# Altium PCB PCB2.PcbDoc (part 1 of 2)
Units mil, origin at the board's own origin, x right, y up, seen from the top; angles counter-clockwise.
Board outline 2500 x 2460 mil, 2 copper layers (Top Layer, Bottom Layer); 50 components, 75 nets, 347 pads, 13 vias.
Unrouted connection lines stored in the file: 43.
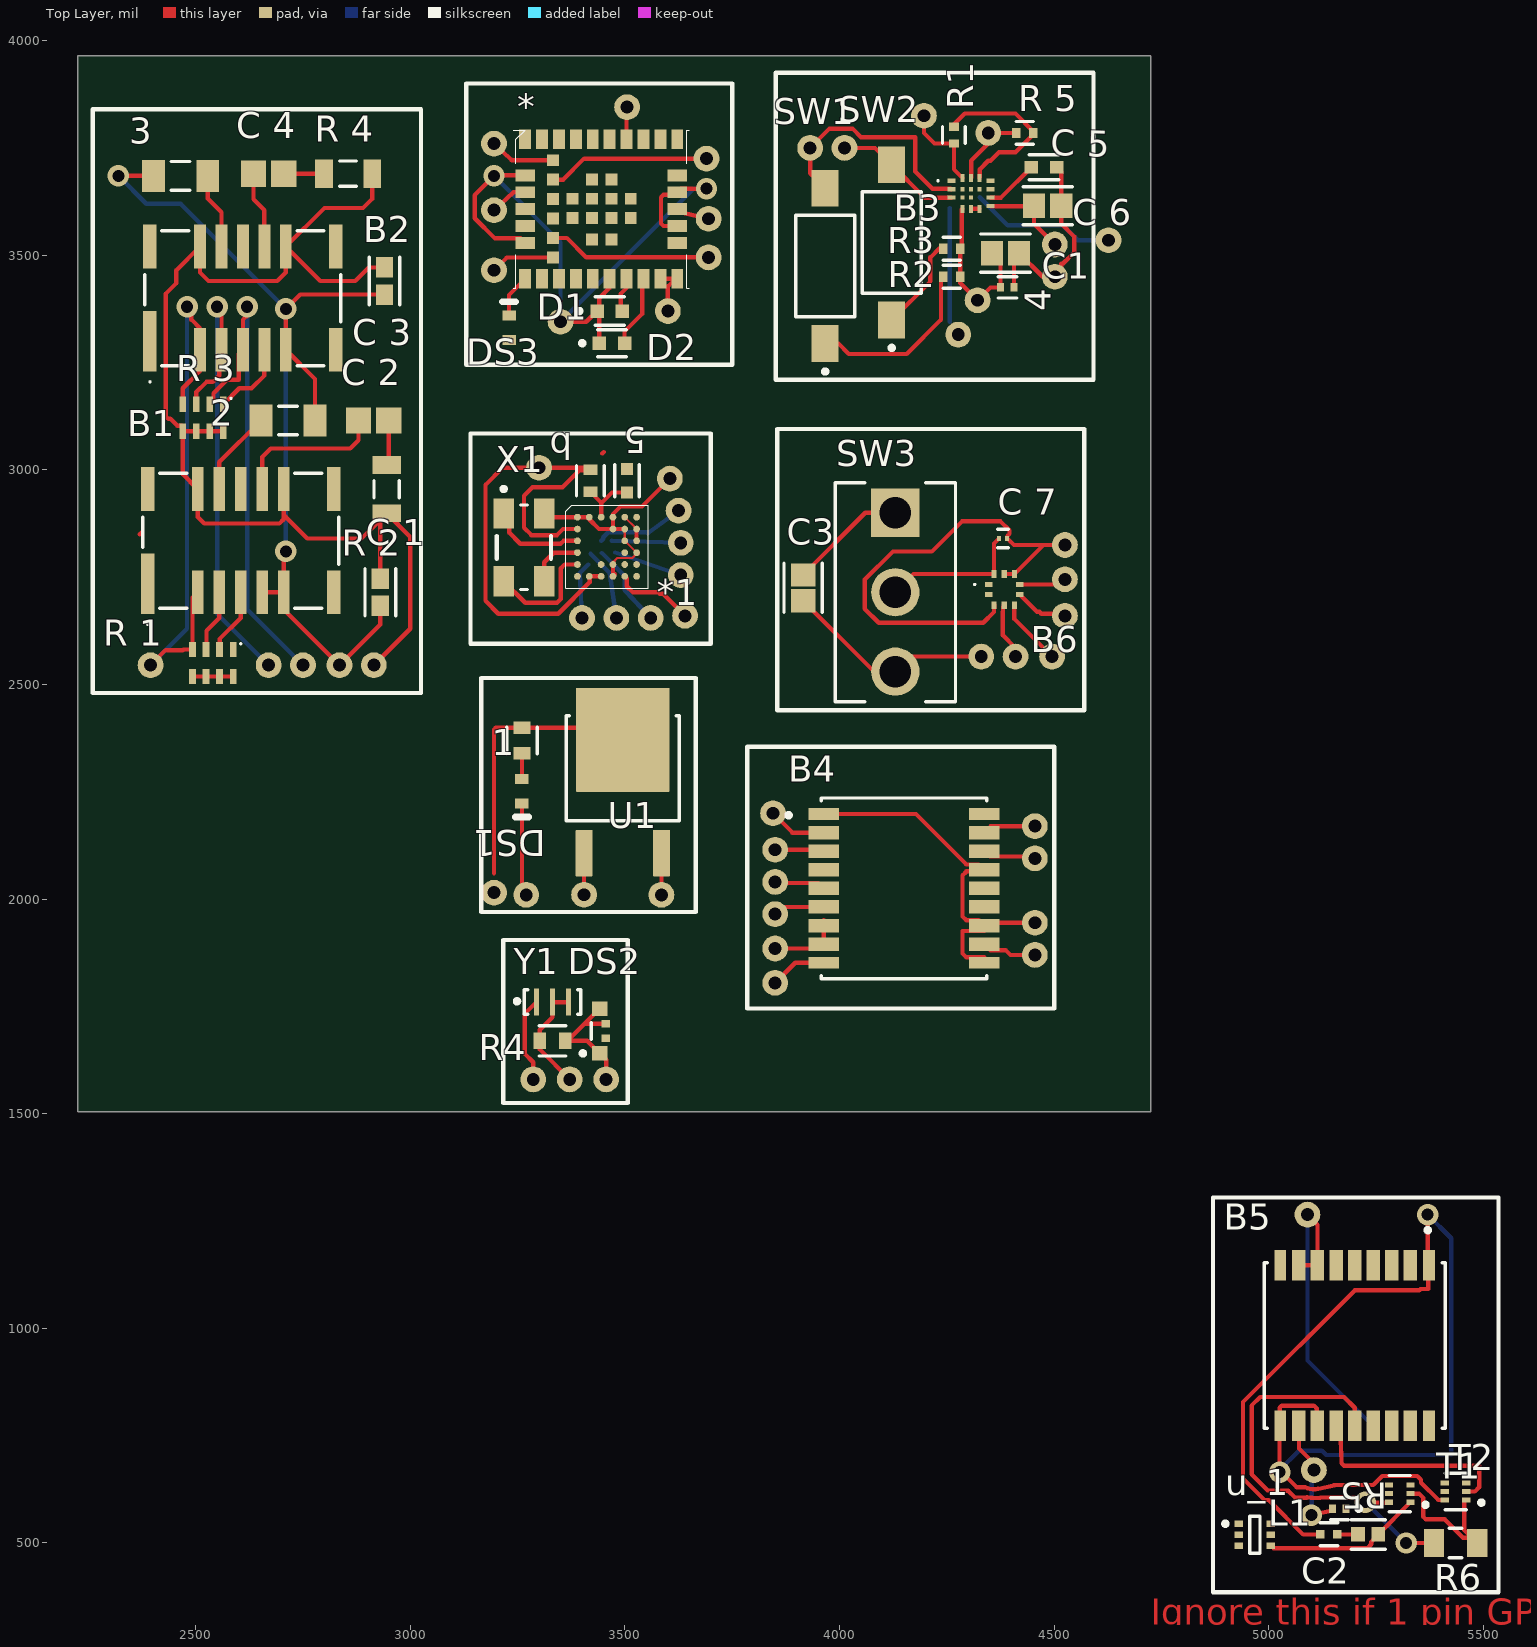
[diagram p0: Top Layer view]
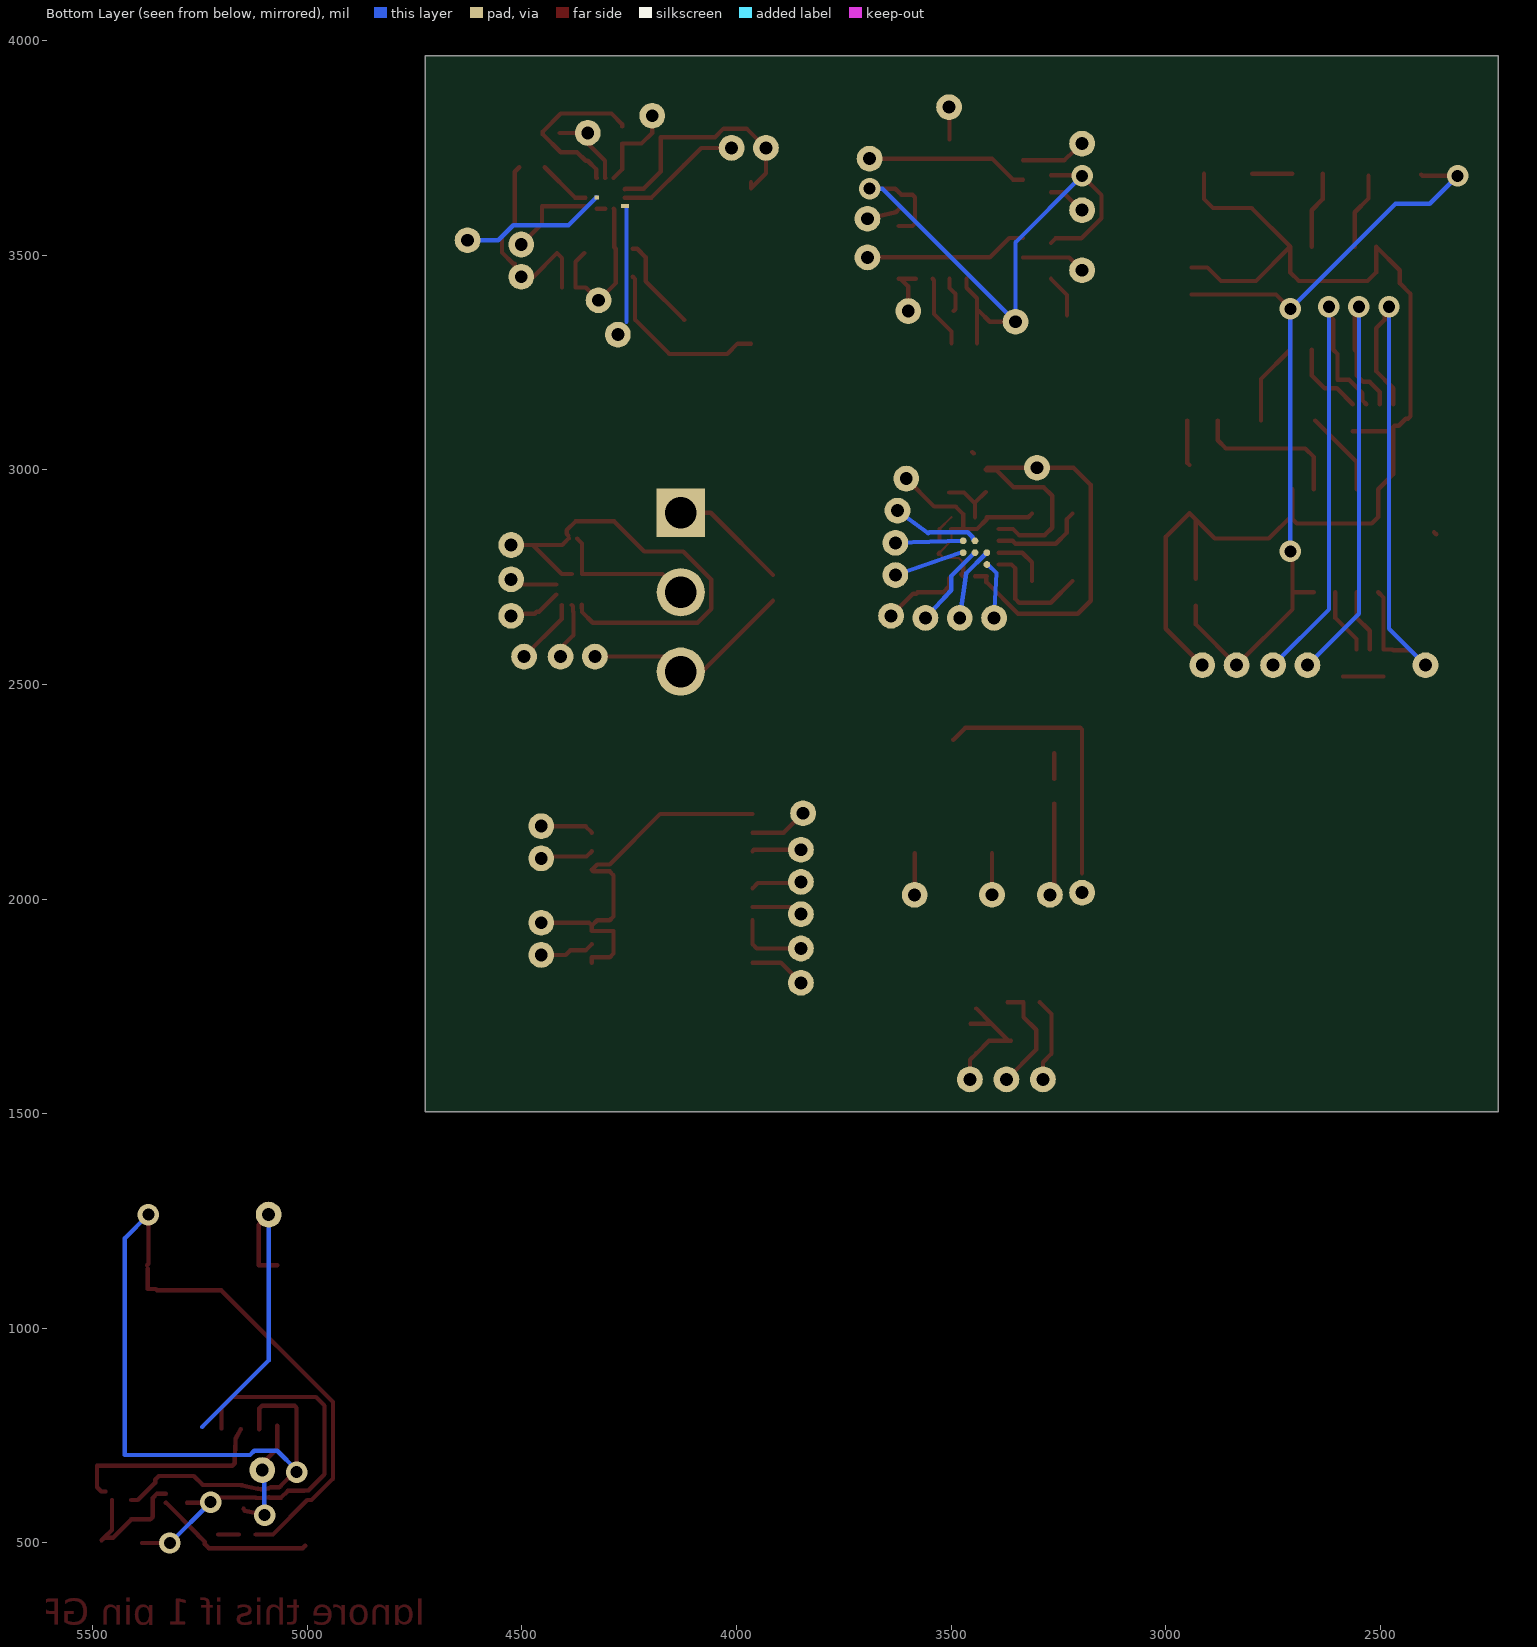
[diagram p1: Bottom Layer view, seen from below]

## Layer stack, top to bottom
Top Solder: solder mask 0.4, Solder Resist, Dk 3.5
Top Layer: signal copper 1.4
Dielectric 1: dielectric 12.6, FR-4, Dk 4.8
Bottom Layer: signal copper 1.4
Bottom Solder: solder mask 0.4, Solder Resist, Dk 3.5

## Board outline
2225,3965 2225,1505 4725,1505 4725,3965

## Design rules (kind name [scope] priority, off if disabled: settings)
Clearance [All] p1: gap=10 ignorepadtopadclearanceinfootprint=FALSE
PolygonConnect [All] p1: connectstyle=Relief reliefconductorwidth=10 reliefentries=4 polygonreliefangle="90 Angle" airgapwidth=10
RoutingVias [All] p1: holewidth=28 width=50 viastyle="Through Hole" minholewidth=28 minwidth=50 maxholewidth=28 maxwidth=50
SolderMaskExpansion [All] p1: expansion=4 istentingtop=FALSE
SupplyNets "Schematic Supply Nets_10" [InNet('1.25V')] p1: voltage=0.000
SupplyNets "Schematic Supply Nets_9" [InNet('GND')] p2: voltage=0.000
SupplyNets "Schematic Supply Nets_8" [InNet('VDD')] p3: voltage=0.000
SupplyNets "Schematic Supply Nets_7" [InNet('3.3V')] p4: voltage=0.000
SupplyNets "Schematic Supply Nets_6" [InNet('VCC')] p5: voltage=0.000
SupplyNets "Schematic Supply Nets_5" [InNet('+5')] p6: voltage=0.000
SupplyNets "Schematic Supply Nets_4" [InNet('VDDIO 1.8V')] p7: voltage=0.000
SupplyNets "Schematic Supply Nets_3" [InNet('VCC 3.3V')] p8: voltage=0.000
SupplyNets "Schematic Supply Nets_2" [InNet('antenna')] p9: voltage=0.000
SupplyNets "Schematic Supply Nets_1" [InNet('AVDD 1.8V')] p10: voltage=0.000
SupplyNets "Schematic Supply Nets" [InNet('+1.25')] p11: voltage=0.000
Width [All] p1: maxlimit=10 minlimit=10 preferedwidth=10
30 further rules are at their usual default settings.

## Components (designator, comment, footprint, x,y, rotation, side; value= is the part's Value field where it differs from the comment)
1 "CRCW0603220RFKEA" FP-CRCW0603-e3-MFG 3260,2369.53 r90 top
2 "CAP 1.5uF 16V 1206(3216)" CAPC1206(3216)190_M 2715,3115 r0 top value=1.5uF
3 "CAP 1.5uF 16V 1206(3216)" CAPC1206(3216)190_M 2465,3685 r180 top value=1.5uF
4 "GRM155R61A105KE15D" FP-GRM15-0_1-MFG 4390.75,3425 r180 top value=1uF
5 "CGA3E2C0G1H060D080AA" FP-CGA3E-0_3-0_1-MFG 3504.63,2974.63 r270 top
* "Component_1" NINA-W131 3267.52,3686.14 r0 top
*1 "Component_1" "ATA8350 - duplicate" 3389.39,2889.74 r0 top
B1 "AMG8854" AMG8854 2605,2834.92 r0 top
B2 "AMG8854" AMG8854 2610,3399.92 r0 top
B3 "BHI360" BHI360 4306.18,3644.09 r0 top
B4 "MAX-M8Q-0" FP-MAX-M8Q-0-MFG 4150,2025 r0 top
B5 "MAX-M8Q-0" FP-MAX-M8Q-0-MFG 5200,960 r270 top
B6 "LPS25HBTR" LPS25HBTR 4383.62,2721.22 r0 top
C1 "08051C104K4T2A" FP-0805-L_2_01_0_2-W_1_25-IPC_B 4386.5,3505 r180 top
C2 "CC0402KPX7R7BB103" FP-CC0402-MFG 5140,520 r180 top value="10 nF"
C3 "C2012X5R1H475K125AB" FP-C2012-125-0_2-IPC_B 3915,2725 r90 top
"C 1" "GRM188R60J106ME47D" FP-GRM188-0_1-e0_2_0_55-IPC_A 2930,2715 r270 top
"C 2" "C0805C105K8RACTU" CAPC2013X100X50ML20T25 2914.57,3115 r0 top
"C 3" "GRM188R60J106ME47D" FP-GRM188-0_1-e0_2_0_55-IPC_A 2940,3440 r270 top
"C 4" "C0805C105K8RACTU" CAPC2013X100X50ML20T25 2670,3690 r0 top
"C 5" "KAF15BR71E224KT" FP-KAF15B-MFG 4476.5,3705 r180 top
"C 6" "08051C104K4T2A" FP-0805-L_2_01_0_2-W_1_25-IPC_B 4484.77,3615 r180 top
"C 7" "GRM033R60J104KE19D" FP-GRM033-0_03-MFG 4380.65,2840 r180 top
D1 "LTST-C190GKT" FP-LTST-C190GKT-MFG 3464.53,3370 r0 top
D2 "LTST-C191TBKT" FP-LTST-C191TBKT-MFG 3469.53,3295 r0 top
DS1 "TLMS1000-GS08" VISH-TLMS1000_V 3260,2251.46 r270 top
DS2 "HSMF-C113" AVAG-HSMF-C11X_H1_V 3441.3,1692.83 r90 top
DS3 "TLMS1000-GS08" VISH-TLMS1000_V 3230,3331.46 r90 top
L1 "LQG15HN27NJ02D" FP-LQG15HH_02-MFG 5164.25,580 r180 top
q "LQW18AN12NG00D" FP-LQW18AN_00-MFG 3419.63,2974.63 r270 top (schematic designator "high Q inductor1")
R1 "AC0402FR-074K7L" FP-AC0402-MFG 4266.5,3780 r90 top
R2 "AC0402FR-074K7L" FP-AC0402-MFG 4261.5,3450 r0 top
R3 "AC0402FR-074K7L" FP-AC0402-MFG 4261.5,3515 r0 top
R4 "CRCW0603220RFKEA" FP-CRCW0603-e3-MFG 3331.3,1670 r0 top
R5 "RMCF0603JT100K" FP-RMCF0603-IPC_C 5231.34,520 r180 top
R6 "RMCF1206JT10R0" FP-RMCF1206-IPC_C 5435.22,500 r0 top
"R 1" "CAT16-103J4LF" BOUR-CAT16-103J4LF_L 2540,2550 r270 top
"R 2" "RC1206JR-0720RL" RESC3116X65X40NL10T20 2945,2955 r270 top
"R 3" "CAT16-103J4LF" BOUR-CAT16-103J4LF_L 2517.24,3121.5 r270 top
"R 4" "RC1206JR-0720RL" RESC3116X65X40NL10T20 2855,3690 r0 top
"R 5" "AC0402FR-074K7L" FP-AC0402-MFG 4431.5,3785 r0 top
SW1 "FSMSMTR" TECO-FSMSMTR_V 3966.5,3475 r90 top
SW2 "FSMSMTR" TECO-FSMSMTR_V 4121.5,3530 r90 top
SW3 "A101SYCB04" FP-A101SYCB04-MFG 4130,2715 r0 top
T1 "SI1016X-T1-GE3" FP-C14-0439-MFG 5305,615 r180 top
T2 "SI1016X-T1-GE3" FP-C14-0439-MFG 5435,620 r180 top
U1 "LM317MKVURG3" FP-KVU0003A-MFG 3495,2305 r0 top
u_1 "NC7WZ07P6X" FP-419AD-01-MFG 4967.6,519.41 r0 top
X1 "48MHz Crystal" ABRA-ABM3B-4_V 3264.63,2819.63 r270 top
Y1 "CSTCE20M0V53-R0" FP-CSTCE_V-MFG 3331.3,1760 r0 top

## Footprints (in the part's own frame and the unit in brackets; to place one, negate y for a bottom-side part, rotate by r counter-clockwise, add the part's x,y. Pads: shape width x height; smd on the part's side, far side on the other; paste and mask are expansions set on the pad)
ABRA-ABM3B-4_V [mm] "SMD, 4-Leads, Body 5x3.2mm"
  rect 1.8x1.2 smd: 1(-2,-1.2) 2(2,-1.2) 3(2,1.2) 4(-2,1.2)
  silkscreen extent -3.57,-1.6 2.5,1.6, body extent -2.5,-1.59 2.5,1.59, height 1.13
AMG8854 [mm]
  rect 0.8x3.6 smd: 1(-5.5,-2.55)
  rect 0.7x2.6 smd: 2(-2.54,-3.05) 3(-1.27,-3.05) 4(0,-3.05) 5(1.27,-3.05) 6(2.54,-3.05) 9(2.54,3.05) 10(1.27,3.05) 11(0,3.05) 12(-1.27,3.05) 13(-2.54,3.05)
  rect 0.8x2.6 smd: 7(5.5,-3.05) 8(5.5,3.05) 14(-5.5,3.05)
  silkscreen extent -5.8,-5 5.8,4
"ATA8350 - duplicate" [mm]
  round 0.4 smd: A1(0,0) A2(0.7,0) A3(1.4,0) A4(2.1,0) A5(2.8,0) A6(3.5,0) B1(0,-0.7) B4(2.1,-0.7) B5(2.8,-0.7) B6(3.5,-0.7) C1(0,-1.4) C5(2.8,-1.4) C6(3.5,-1.4) D1(0,-2.1) D5(2.8,-2.1) D6(3.5,-2.1) E1(0,-2.8) E3(1.4,-2.8) E4(2.1,-2.8) E5(2.8,-2.8) E6(3.5,-2.8) F1(0,-3.5) F2(0.7,-3.5) F3(1.4,-3.5) F4(2.1,-3.5) F5(2.8,-3.5) F6(3.5,-3.5)
  round 0.4 smd far side: C3(1.4,-1.4) C4(2.1,-1.4) D2(0.7,-2.1) D3(1.4,-2.1) D4(2.1,-2.1) E2(0.7,-2.8)
  silkscreen extent -0.7,-4.2 4.2,0.7
AVAG-HSMF-C11X_H1_V [mm] "SMD, 4-Leads, Body 2.5x1mm"
  rect 0.85x0.9 smd: 1(-1.325,0) 4(1.325,0)
  rect 0.45x0.5 smd: 2(-0.425,-0.35) 3(0.425,-0.35)
  silkscreen extent -1.45,0.5 0.5,1.12, body extent -1.25,-0.5 1.25,0.5, height 1
BHI360 [mm]
  rect 0.475x0.25 smd: 1(-1.163,0.75) 2(-1.163,0.25) 3(-1.163,-0.25) 8(1.163,-0.75) 9(1.163,-0.25) 10(1.163,0.25) 11(1.163,0.75)
  rect 0.475x0.25 smd far side: 4(-1.163,-0.75)
  rect 0.25x0.475 smd: 5(-0.5,-0.913) 6(0,-0.913) 7(0.5,-0.913) 12(0.5,0.912) 13(0,0.912) 14(-0.5,0.912)
  rect 0.25x0.25 smd: 15(-0.5,-0.25) 16(0,-0.25) 18(0.5,0.25) 19(0,0.25) 20(-0.5,0.25)
  rect 0.25x0.25 smd far side: 17(0.5,-0.25)
  silkscreen extent -2,0.7 -1.9,0.8
BOUR-CAT16-103J4LF_L [mm] "Chip Array, 8-Leads, Body 3.4x1.6mm, Pitch 0.8mm, IPC High Density"
  rect 0.9x0.4 smd: 1(-0.8,1.2) 2(-0.8,0.4) 3(-0.8,-0.4) 4(-0.8,-1.2) 5(0.8,-1.2) 6(0.8,-0.4) 7(0.8,0.4) 8(0.8,1.2)
  silkscreen extent -1.19,1.6 -1.09,1.7, body extent -0.95,-1.7 0.95,1.7, height 0.6
CAPC1206(3216)190_M [mm] "Chip Capacitor, Body 3.2x1.6mm, Height 1.9mm, IPC Low Density"
  rect 1.35x1.9 smd: 1(-1.6,0) 2(1.6,0)
  silkscreen extent -0.55,-0.85 0.55,0.85, body extent -1.7,-0.9 1.7,0.9, height 1.9
CAPC2013X100X50ML20T25 [mm] "Chip Capacitor, 2-Leads, Body 2.00x1.25mm, IPC Low Density"
  rect 1.5x1.55 smd: 1(-0.9,0) 2(0.9,0)
  body extent -1.1,-0.72 1.1,0.72, height 1
FP-419AD-01-MFG [mm]
  rect 0.5x0.4 smd paste+0 mask+0: 1(-0.95,0.65) 2(-0.95,0) 3(-0.95,-0.65) 4(0.95,-0.65) 5(0.95,0) 6(0.95,0.65)
  silkscreen extent -1.87,-1.1 0.3,1.1, body extent -1.3,-1.2 1.3,1.2, height 0.25
FP-0805-L_2_01_0_2-W_1_25-IPC_B [mil]
  rect 51.36x57.33 smd paste+0 mask+0: 1(-31.72,0) 2(31.72,0)
  silkscreen extent -57,-44 57,44, body extent -67,-39 67,39, height 10
FP-A101SYCB04-MFG [mil]
  rect 112.37x112.37 hole 73 paste-99999 mask+0: 1(0,185)
  round 112.37 hole 73 paste-99999 mask+0: 2(0,0) 3(0,-185)
  silkscreen extent -140,-255 140,255, body extent -144,-259 144,259, height 10
FP-AC0402-MFG [mm]
  rect 0.5x0.6 smd paste+0 mask+0: 1(-0.5,0) 2(0.5,0)
  silkscreen extent -0.5,-0.67 0.5,0.67, body extent -0.85,-0.4 0.85,0.4, height 0.25
FP-C14-0439-MFG [mil]
  rect 19x12 smd paste+0 mask+0: 1(-25,20) 2(-25,0) 3(-25,-20) 4(25,-20) 5(25,0) 6(25,20)
  silkscreen extent -65,-42 25,42, body extent -38,-40 38,40, height 10
FP-C2012-125-0_2-IPC_B [mil]
  rect 54.25x57.33 smd paste+0 mask+0: 1(-30.08,0) 2(30.08,0)
  silkscreen extent -57,-44 57,44, body extent -67,-39 67,39, height 10
FP-CC0402-MFG [mm]
  rect 0.5x0.5 smd paste+0 mask+0: 1(-0.5,0) 2(0.5,0)
  silkscreen extent -0.53,-0.68 0.53,0.67, body extent -0.87,-0.48 0.87,0.48, height 0.25
FP-CGA3E-0_3-0_1-MFG [mm]
  rect 0.7x0.7 smd paste+0 mask+0: 1(-0.7,0) 2(0.7,0)
  silkscreen extent -0.95,-0.72 0.95,0.72, body extent -1.15,-0.65 1.15,0.65, height 0.25
FP-CRCW0603-e3-MFG [mm]
  rect 0.75x1 smd paste+0 mask+0: 1(-0.75,0) 2(0.75,0)
  silkscreen extent -0.8,-0.9 0.8,0.9, body extent -1.22,-0.6 1.22,0.6, height 0.25
FP-CSTCE_V-MFG [mm]
  rect 0.3x1.6 smd paste+0 mask+0: 1(-0.95,0) 2(0,0) 3(0.95,0)
  silkscreen extent -2.22,-0.72 1.68,0.72, body extent -1.78,-0.9 1.78,0.9, height 0.25
FP-GRM15-0_1-MFG [mm]
  rect 0.4x0.5 smd paste+0 mask+0: 1(-0.4,0) 2(0.4,0)
  silkscreen extent -0.55,-0.63 0.55,0.63, body extent -0.7,-0.38 0.7,0.38, height 0.25
FP-GRM033-0_03-MFG [mm]
  rect 0.25x0.3 smd paste+0 mask+0: 1(-0.238,0) 2(0.238,0)
  silkscreen extent -0.32,-0.54 0.32,0.54, body extent -0.46,-0.27 0.46,0.27, height 0.25
FP-GRM188-0_1-e0_2_0_55-IPC_A [mil]
  rect 47.57x39.85 smd paste+0 mask+0: 1(-31.57,0) 2(31.57,0)
  silkscreen extent -55,-36 55,36, body extent -75,-40 75,40, height 10
FP-KAF15B-MFG [mm]
  rect 0.8x0.75 smd paste+0 mask+0: 1(-0.75,0) 2(0.75,0)
  silkscreen extent -0.87,-0.75 0.87,0.75, body extent -1.25,-0.58 1.25,0.58, height 0.25
FP-KVU0003A-MFG [mm]
  rrect10% 1x2.75 smd paste+0 mask+0: 1(-2.29,-5.025) 3(2.29,-5.025)
  rrect2% 5.55x6.15 smd paste-1000 mask+0: 4(0,1.675)
  silkscreen extent -3.35,-3.11 3.35,3.11, body extent -3.45,-6.5 3.45,4.85, height 0.25
FP-LQG15HH_02-MFG [mm]
  rect 0.4x0.5 smd paste+0 mask+0: 1(-0.4,0) 2(0.4,0)
  silkscreen extent -1.28,-0.64 0.53,0.65, body extent -0.7,-0.38 0.7,0.38, height 0.25
FP-LQW18AN_00-MFG [mm]
  rect 0.625x0.85 smd paste+0 mask+0: 1(-0.663,0) 2(0.663,0)
  silkscreen extent -0.9,-0.82 0.9,0.82, body extent -1.07,-0.6 1.07,0.6, height 0.25
FP-LTST-C190GKT-MFG [mm]
  rect 0.8x0.8 smd paste+0 mask+0: 1(-0.75,0) 2(0.75,0)
  silkscreen extent -1.92,-0.85 0.85,0.85, body extent -1.25,-0.55 1.25,0.55, height 0.25
FP-LTST-C191TBKT-MFG [mm]
  rect 0.8x0.8 smd paste+0 mask+0: 1(-0.75,0) 2(0.75,0)
  silkscreen extent -1.87,-0.8 0.85,0.8, body extent -1.25,-0.55 1.25,0.55, height 0.25
FP-MAX-M8Q-0-MFG [mm]
  rect 1.8x0.7 smd paste-1000 mask-1000: 1(-4.75,4.4) 9(-4.75,-4.4) 10(4.75,-4.4) 18(4.75,4.4)
  rect 1.8x0.8 smd paste-1000 mask-1000: 2(-4.75,3.3) 3(-4.75,2.2) 4(-4.75,1.1) 5(-4.75,0) 6(-4.75,-1.1) 7(-4.75,-2.2) 8(-4.75,-3.3) 11(4.75,-3.3) 12(4.75,-2.2) 13(4.75,-1.1) 14(4.75,0) 15(4.75,1.1) 16(4.75,2.2) 17(4.75,3.3)
  silkscreen extent -6.95,-5.35 4.9,5.35, body extent -6.35,-5.45 6.35,5.45, height 0.25
FP-RMCF0603-IPC_C [mil]
  rect 31.73x33.79 smd paste+0 mask+0: 1(-23.66,0) 2(23.66,0)
  silkscreen extent -40,-34 40,34, body extent -43,-23 43,23, height 10
FP-RMCF1206-IPC_C [mil]
  rect 47.39x65.28 smd paste+0 mask+0: 1(-50.22,0) 2(50.22,0)
  silkscreen extent -15,-34 15,34, body extent -78,-38 78,38, height 10
LPS25HBTR [mm]
  rect 0.45x0.3 smd: 1(-0.92,0.3) 2(-0.92,-0.3) 6(0.92,-0.3) 7(0.92,0.3)
  rect 0.3x0.45 smd: 3(-0.6,-0.92) 4(0,-0.92) 5(0.6,-0.92) 8(0.6,0.92) 9(0,0.92) 10(-0.6,0.92)
  silkscreen extent -1.8,0.25 -1.7,0.35
NINA-W131 [mm]
  rect 0.7x1.15 smd: 1(0,-6.125) 2(1,-6.125) 3(2,-6.125) 4(3,-6.125) 5(4,-6.125) 6(5,-6.125) 7(6,-6.125) 8(7,-6.125) 9(8,-6.125) 10(9,-6.125) 16(9,2.125) 17(8,2.125) 18(7,2.125) 19(6,2.125) 20(5,2.125) 21(4,2.125) 22(3,2.125) 23(2,2.125) 24(1,2.125) 25(0,2.125)
  rect 1.15x0.7 smd: 11(9,-4) 12(9,-3) 13(9,-2) 14(9,-1) 15(9,0) 26(0,0) 27(0,-1) 28(0,-2) 29(0,-3) 30(0,-4)
  rect 0.701x0.701 smd: 31(1.651,-4.856) 32(1.651,-3.706) 33(1.651,-2.555) 34(1.651,-1.405) 35(1.651,-0.254) 36(1.651,0.897) ""(2.802,-2.532) ""(2.802,-1.389) ""(3.952,-3.802) ""(3.952,-2.532) ""(3.952,-1.389) ""(3.952,-0.246) ""(5.103,-3.802) ""(5.103,-2.532) ""(5.103,-1.389) ""(5.103,-0.246) ""(6.253,-2.532) ""(6.253,-1.389)
  silkscreen extent -0.7,-6.68 9.7,2.67
RESC3116X65X40NL10T20 [mm] "Chip Resistor, 2-Leads, Body 3.10x1.60mm, IPC Medium Density"
  rect 1.05x1.7 smd: 1(-1.425,0) 2(1.425,0)
  silkscreen extent -0.5,-0.75 0.5,0.75, body extent -1.6,-0.85 1.6,0.85, height 0.65
TECO-FSMSMTR_V [mm] "SMD, 2-Leads, Body 6x3.5mm, Pitch 9.19mm"
  rect 2.2x1.6 smd: 1(-4.595,0)
  rect 2.18x1.6 smd: 2(4.595,0)
  silkscreen extent -6.37,-1.75 3,1.75, body extent -4.98,-1.75 4.98,1.75, height 4.4
VISH-TLMS1000_V [mm] "SMD, 2-Leads, Body 0.8x1.6mm"
  rect 0.6x0.8 smd: 1(-0.725,0) 2(0.725,0)
  silkscreen extent 1.52,-0.4 1.52,0.4, body extent -0.8,-0.4 0.8,0.4, height 0.65

## Part data
1 R4: library part CMP-2000-03085-2, "RES Thick Film, 220Ω, 1%, 0.1W, 100ppm/°C, 0603", Case Code (Imperial)=0603, Case Code (Metric)=1608, Max Operating Temperature=155°C, Max Power Dissipation=100mW, Min Operating Temperature=-55°C, Package Quantity=10, Resistance=220R, Temperature Coefficient=100ppm/°C, Tolerance=1%, Voltage Rating=75V, Case/Package=0603, Composition="Thick Film", Contact Plating=Tin, Depth=0.85mm, Features="Automotive AEC-Q200", Height=0.45mm, Lead Free="Lead Free", Length=1.55mm, Military Standard=Not, Number of Terminations=2, Packaging="Tape and Reel", Power Rating=100mW, Radiation Hardening=No, Termination=SMD/SMT, Voltage Rating (DC)=75V, Weight=7.1E-05oz, Width=0.033inch
2 3: library part CMP-1037-04758-1, "CAP 1.5uF 16V ±10% 1206 (3216 Metric) Thickness 1.9mm SMD", Case-EIA=1206, Case-Metric=3216, Rated Voltage="16 V", Tolerance=Â±10%, Max Thickness="1.9 mm", Technology=SMT
4: library part CMP-2008-04556-2, "CAP CER 1UF 10V X5R 0402", Capacitance=1uF, Manufacturer=Murata, Package=GRM15-0.1, Temperature="-55°C to +85°C", Temperature Characteristic=X5R, Temperature Coefficient=15%, Temperature Range High=+85°C, Temperature Range Low=-55°C, Tolerance=10%, Voltage Rating=10V, Automotive=No, Category=Cap, ComponentLink2Description=Datasheet, ComponentLink2URL=https://search.murata.co.jp/Ceramy/image/img/A01X/G101/ENG/GRM155R61A105KE15-01A.pdf, Device Class L1="Passive Components", Device Class L2=Capacitors, Device Class L3="Ceramic Capacitors", Digikey Description="CAP CER 1UF 10V X5R 0402", Height=0.55mm, Ipc Land Pattern Name=CAPC10050X50, Lead Free=Yes, Manufacturer Part Number=GRM155R61A105KE15D, Material=Ceramic, Mouser Description="0402 1 uF 10 V ±10% Tolerance X5R Surface Mount Multilayer Ceramic Capacitor", Octopart=https://octopart.com/grm155r61a105ke15d-murata-197442, RoHS=TRUE
5: library part CMP-08246-001317-1, "Cap Ceramic 6pF 50V C0G 0.5pF Pad SMD 0603 +125°C Automotive T/R", Capacitance=6pF, Case Code (Imperial)=0603, Case Code (Metric)=1608, Dielectric=C0G, Max Operating Temperature=125°C, Min Operating Temperature=-55°C, Package Quantity=1, Ratings=AEC-Q200, Voltage Rating=50V, Case/Package=0603, Composition=Ceramic, Depth=0.8mm, Height=0.8mm, Length=1.6mm, Mount="Surface Mount", Packaging="Tape and Reel", REACH SVHC="No SVHC", Termination=SMD/SMT, Thickness=0.035inch, Voltage Rating (DC)=50V, Weight=7.1E-05oz, Width=0.031inch
B1 B2: "Product: Infrared Array Sensor Grid-EYE, Series/Type: AMG88xx (High performance type), Number of pixel: 64 (Vertical 8 x Horizontal 8 Matrix), Operating voltage (DC) (V): 5, Viewing angle (): 60, Amplification factor: Low gain, Mounting form: Surface Mount Type", Manufacturer_Name=Panasonic, Mouser Part Number=667-AMG8854, Datasheet Link=https://industrial.panasonic.com/cdbs/www-data/pdf/ADI8000/ADI8000C66.pdf, Geometry.Height=4.3mm, Manufacturer_Part_Number=AMG8854, Mouser Price/Stock=https://www.mouser.co.uk/ProductDetail/Panasonic/AMG8854?qs=sSYV1F9c5cGiWvzHDbpBOw%3D%3D
B3: "IMUs - Inertial Measurement Units Programmable smart sensor combining accelerometer, gyroscope and fusion software", Manufacturer_Name=BOSCH, Mouser Part Number=262-BHI360, Datasheet Link=https://www.bosch-sensortec.com/media/boschsensortec/downloads/datasheets/bst-bhi360-ds000.pdf, Geometry.Height=1mm, Manufacturer_Part_Number=BHI360, Mouser Price/Stock=https://www.mouser.co.uk/ProductDetail/Bosch-Sensortec/BHI360?qs=ulEaXIWI0c93cz3Dqv%252BGgg%3D%3D
B4 B5: library part CMP-207130-000017-1, "RF RCVR GNSS/GPS 1.575GHZ 18LCC", Case/Package=SMD/SMT, Current - Receiving=23mA, Frequency=1.575GHz, Max Operating Temperature=85°C, Min Operating Temperature=-40°C, Interface=I2C, Packaging="Cut Tape", RoHS Compliant=Yes, Sensitivity=-167dBm
B6: "Board Mount Pressure Sensor 26kPa to 126kPa Absolute 10-Pin HLGA T/R", Manufacturer_Name=STMicroelectronics, Mouser Part Number=511-LPS25HBTR, Datasheet Link=https://www.st.com/resource/en/datasheet/lps25hb.pdf, Geometry.Height=0.8mm, Manufacturer_Part_Number=LPS25HBTR, Mouser Price/Stock=https://www.mouser.co.uk/ProductDetail/STMicroelectronics/LPS25HBTR?qs=GDOUxV2YAh9IvjPyBKWGzQ%3D%3D
C1 "C 6": library part CMP-2007-04172-2, "Automotive Ceramic Capacitor, 0805, 100nF, 10%, X7R, 15%, 100V", Capacitance=100nF, Case Code (Imperial)=0805, Case Code (Metric)=2012, Dielectric=X7R, Dielectric Material=Ceramic, Max Operating Temperature=125°C, Min Operating Temperature=-55°C, Package Quantity=1, Ratings=AEC-Q200, Tolerance=10%, Voltage=100V, Case/Package=0805, Construction=Flat, Depth=1.25mm, Height=1.4mm, Lead Free="Lead Free", Length=2.01mm, Mount="Surface Mount", Number of Pins=2, Packaging="Tape and Reel", Radiation Hardening=No, REACH SVHC="No SVHC", RoHS Compliant=Yes, Series=-, Termination=SMD/SMT, Thickness=0.055inch, Voltage Rating=100V, Voltage Rating (DC)=100V, Width=0.049inch
C2: library part CMP-03422-000420-1, "CC0402 10 nF X7R 10.00% 16 V", Capacitance="10 nF", Manufacturer=YAGEO, Package=CC0402, Temperature="-55°C to +125°C", Temperature Characteristic=X7R, Temperature Coefficient=30ppm/°C, Temperature Range High=+125°C, Temperature Range Low=-55°C, Tolerance=0.1, Voltage Rating="16 V", Automotive=No, Automotive Grade=NA, Category=Cap, ComponentLink2Description=Datasheet, ComponentLink2URL=http://www.yageo.com/documents/recent/UPY-GP_NP0_16V-to-50V_16.pdf, Device Class L1="Passive Components", Device Class L2=Capacitors, Device Class L3="Ceramic Capacitors", Footprint Url=http://www.yageo.com/exep/pages/download/literatures/UPY-C_GEN_24.pdf, Height=0.55mm, Ipc Land Pattern Name=CAPC10050X50, Lead Free=Yes, Manufacturer Part Number=CC0402KPX7R7BB103, Material=Ceramic, Mouser Description="Multilayer Ceramic Capacitors MLCC - SMD/SMT 10nF 16V X7R 10%", Octopart=https://octopart.com/cc0402kpx7r7bb103-yageo-12885102, RoHS=TRUE
C3: library part CMP-08246-000007-2, "Multilayer Ceramic Capacitors 4.7μF ±10% 50V X5R SMD 0805", Capacitance=4.7uF, Case Code (Imperial)=0805, Case Code (Metric)=2012, Dielectric=X5R, Dielectric Material=Ceramic, Max Operating Temperature=85°C, Min Operating Temperature=-55°C, Package Quantity=1, Tolerance=10%, Voltage=50V, Case/Package=0805, Construction=Flat, Depth=1.25mm, Height=1.25mm, Lead Free="Lead Free", Length=2mm, Mount="Surface Mount", Packaging="Tape and Reel", Radiation Hardening=No, REACH SVHC="No SVHC", Resistor Type=Ceramic, Series=C, Termination=SMD/SMT, Thickness=0.057inch, Voltage Rating=50V, Voltage Rating (DC)=50V, Weight=0.000194oz, Width=0.049inch
"C 1" "C 3": library part CMP-2006-02792-2, "Chip Multilayer Ceramic Capacitors for General Purpose, 0603, 10uF, X5R, 15%, 20%, 6.3V", Capacitance=10uF, Case Code (Imperial)=0603, Case Code (Metric)=1608, Dielectric=X5R, Max Operating Temperature=85°C, Min Operating Temperature=-55°C, Package Quantity=4000, Tolerance=20%, Voltage=6.3V, Case/Package=0603, Depth=0.8mm, Height=0.8mm, Lead Free="Lead Free", Length=1.6mm, Material=Ceramic, Mount="Surface Mount", Packaging="Tape and Reel", Radiation Hardening=No, REACH SVHC="No SVHC", Termination=SMD/SMT, Thickness=0.035inch, Voltage Rating=6.3V, Voltage Rating (DC)=6.3V, Width=0.031inch
"C 2" "C 4": library part CMP-2007-03676-1, Manufacturer=Kemet, Part Number=C0805C105K8RACTU
"C 5": library part CMP-00048-140164113-1, "KAF15BR71E224KT .22UF 25V 10% 0603", Capacitance=220nF, Case/Package=0603, Max Operating Temperature=125°C, Min Operating Temperature=-55°C, Tolerance=10%, Voltage Rating=25V, Height=950µm, Material=Ceramic, NexarPartId=140164113
"C 7": library part CMP-06035-000062-2, "Chip Multilayer Ceramic Capacitors for General Purpose, 0201, 0.10uF, X5R, 15%, 10%, 6.3V", Capacitance=100nF, Case Code (Imperial)=0201, Case Code (Metric)=0603, Dielectric=X5R, Max Operating Temperature=85°C, Min Operating Temperature=-55°C, Package Quantity=1, Tolerance=10%, Voltage=6.3V, Case/Package=0201, Depth=0.3mm, Height=0.3mm, Lead Free="Lead Free", Length=0.6mm, Material=Ceramic, Mount="Surface Mount", Packaging="Tape and Reel", Radiation Hardening=No, REACH SVHC="No SVHC", Termination=SMD/SMT, Thickness=0.013inch, Voltage Rating=6.3V, Voltage Rating (DC)=6.3V, Weight=6E-06oz, Width=0.012inch
D1: library part CMP-22017-000005-2, "LED GREEN CLEAR CHIP SMD", Case Code (Imperial)=0603, Case Code (Metric)=1608, Color=Green, Forward Current=30mA, Forward Voltage=2.1V, Lens Color=Colorless, Max Operating Temperature=85°C, Min Operating Temperature=-55°C, Package Quantity=1, Power Dissipation=100mW, Reverse Voltage=5V, Test Current=10mA, Voltage=2V, Case/Package=0603, Depth=0.8mm, Dominant Wavelength=569nm, Height=0.8mm, Illumination Color=Green, Lead Free="Lead Free", Length=1.6mm, Lens Style=Clear, Lens Transparency=Clear, Luminous Intensity=6mcd, Mount="Surface Mount", Number of Elements=1, Number of LEDs=1, Number of Pins=2, Packaging="Tape and Reel", Power Rating=100mW, Radiation Hardening=No, Viewing Angle=130°, Wavelength=565nm, Width=0.8mm
D2: library part CMP-22017-000008-1, "LED BLUE CLEAR CHIP SMD", Case Code (Imperial)=0603, Case Code (Metric)=1608, Color=Blue, Forward Current=20mA, Forward Voltage=3.8V, Lens Color=Colorless, Max Operating Temperature=80°C, Max Power Dissipation=75mW, Min Operating Temperature=-20°C, Package Quantity=1, Power Dissipation=76mW, Reverse Voltage=5V, Case/Package=0603, Depth=1.6mm, Dominant Wavelength=475nm, Height=0.55mm, Illumination Color=Blue, Lead Free="Lead Free", Length=0.8mm, Lens Style=Diffused, Lens Transparency=Clear, Luminous Intensity=180mcd, Mount="Surface Mount", Number of Elements=1, Number of LEDs=1, Number of Pins=2, Packaging="Tape and Reel", Radiation Hardening=No, Test Current=20mA, Viewing Angle=130°, Wavelength=468nm, Width=0.8mm
DS1 DS3: library part CMP-2000-07254-1, "Low Current LED, 40 mW, 1.8 V, -40 to 100 degC, 2-Pin SMD (0603), RoHS, Tape and Reel", Forward Current If=2mA, Forward Voltage=1.8V, LED Colour=Red, Manufacturer=Vishay, Package Description="2-Pin Surface Mount Device, Body 1.6 x 0.8 mm", Package Reference=TLMS1000, Automotive Qualification Standard=AEC-Q100, Bulb Size=1.6mmx0.8mm, Datasheet URL=https://datasheet.ciiva.com/5798/1698881-5798337.pdf, Datasheet Version="Rev. 1.7, 02/2011", LED Mounting=SMD, Lens Shape=Rectangular, Luminous Intensity=4mcd, Manufacturer URL=http://www.vishay.com/, Mounting Technology=SurfaceMount, MSL=MSL2-1year, Packaging=CutTape, Product Range=-, SVHC=ToBeAdvised, Viewing Angle=80°, Wavelength Typ=636nm
DS2: library part CMP-2000-06422-1, "Right Angle Tricolor Surface Mount Chip LED, Red/Green/Blue, -40 to 85 degC, 4-Pin SMD, RoHS, Tape and Reel", Forward Current=20mA, Forward Voltage=3.9/2.6/2V, Manufacturer=Avago, Operating Temp Range=-40Cto85C, Operating Temperature Classification=Industrial, Package Description="4-Pin Surface Mount Device, Body 2.5 x 1 mm", Package Reference=HSMF-C11X, Package Type=ChipLed, Power Dissipation=59/39/36W, Reverse Voltage=5V, Datasheet URL=https://datasheet.ciiva.com/15117/getdatasheetpartid-133115-15117679.pdf, Datasheet Version=04/2010, DELETED=Compliant, Dominant Wave Length=470/572/626nm, High Brightness=Yes, Lens Dimensions=2.1x1x0.5mm, Lens Type=ColorlessDiffused, Lum Intensity=60/50/80mcd, Luminous Intensity=60/50/80mcd, Main Category=ChipLED, Manufacturer URL=http://www.avagotech.com/, Mounting=SurfaceMount, Mounting Technology=SurfaceMount, Number of  Elements=3, Packaging=TapeandReel, Peak Wavelength=468/570/637nm, Pin Count=4, Product Depth (mm)=1mm, Product Height (mm)=1mm, Product Length (mm)=2.5mm, Rad Hardened=No, Shape Type=Rectangular, Test Current (It)=20mA, Type=Tri-Color, Viewing Angle=125/125/120deg
L1: library part CMP-06042-015205-1, "Multilayer type RF Inductor 27nH ±5% 0.67Ω 300mA 0402", Case Code (Imperial)=0402, Case Code (Metric)=1005, Current Rating=300mA, DC Resistance (DCR)=670mR, Inductance=27nH, Inductance Tolerance=5%, Max Operating Temperature=125°C, Min Operating Temperature=-55°C, Package Quantity=10000, Self Resonant Frequency=1.6GHz, Test Frequency=100MHz, Case/Package=0402, Core Material=Air, DC Current=300mA, Depth=0.55mm, Height=0.02inch, Height - Seated (Max)=0.022inch, Lead Free="Lead Free", Length=0.039inch, Max DC Current=300mA, Military Standard=Not, Mount="Surface Mount", Packaging="Tape and Reel", Q Factor=8, Radiation Hardening=No, REACH SVHC="No SVHC", Shielding=Unshielded, Termination=SMD/SMT, Tolerance=5%, Width=0.02inch
q: library part CMP-06042-001615-1, "Wire Wound RF Inductor 12nH ±2% 600mA 0.13Ω 0603 (1608)", Case Code (Imperial)=0603, Case Code (Metric)=1608, Current=500mA, Current Rating=600mA, DC Resistance (DCR)=130mR, Inductance=12nH, Inductance Tolerance=2%, Max Operating Temperature=125°C, Min Operating Temperature=-55°C, Package Quantity=4000, Resistor Type=Wirewound, Self Resonant Frequency=6GHz, Test Frequency=100MHz, Case/Package=0603, DC Current=600mA, Depth=1mm, Height=0.8mm, Lead Free="Lead Free", Length=1.6mm, Max DC Current=600mA, Military Standard=Not, Mount="Surface Mount", Number of Pins=2, Packaging="Tape and Reel", Q Factor=35, Radiation Hardening=No, REACH SVHC="No SVHC", Series Resistance=130mR, Shielding=Unshielded, Termination=SMD/SMT, Tolerance=2%, Weight=0.000106oz, Width=0.8mm
R1 R2 R3 "R 5": library part CMP-2002-01824-3, "RES 4.7kΩ ±1% 0.063W 0402", Case Code (Imperial)=0402, Case Code (Metric)=1005, Max Operating Temperature=155°C, Max Power Dissipation=63mW, Min Operating Temperature=-55°C, Power Rating=62.5mW, Resistance=4.7kR, Resistor Type="Thick Film", Temperature Coefficient=100ppm/°C, Tolerance=1%, Voltage Rating=50V, Case/Package=0402, Features="Moisture Resistant", Height=0.015inch, Lead Free="Lead Free", Length=0.039inch, Number of Terminations=2, Packaging="Tape and Reel", RoHS Compliant=Yes, Series=AC, Size Code=0402, Termination=SMD/SMT, Weight=2.3E-05oz, Width=0.5mm
R5: library part CMP-26527-000115-1, "100kΩ ±5% 0.1W 0603 Thick Film Chip Resistor AEC-Q200 compliant", Case Code (Imperial)=0603, Case Code (Metric)=1608, Max Operating Temperature=155°C, Max Power Dissipation=100mW, Min Operating Temperature=-55°C, Resistance=100kR, Resistor Type="Thick Film", Temperature Coefficient=100ppm/°C, Tolerance=5%, Case/Package=0603, Construction=Rectangular, Contact Plating=Tin, Depth=0.8mm, Features="Automotive AEC-Q200", Height=0.022inch, Lead Free="Lead Free", Length=1.55mm, Military Standard=Not, Mount="Surface Mount", Number of Terminations=2, Packaging="Tape and Reel", Power Rating=100mW, Radiation Hardening=No, RoHS Compliant=Yes, Series=RMCF, Width=0.031inch
R6: library part CMP-26527-003359-1, "10Ω ±5% 0.25W 1206 Thick Film Chip Resistor AEC-Q200 compliant", Case Code (Imperial)=1206, Case Code (Metric)=3216, Max Operating Temperature=155°C, Max Power Dissipation=250mW, Min Operating Temperature=-55°C, Resistance=10R, Resistor Type="Thick Film", Temperature Coefficient=200ppm/°C, Tolerance=5%, Case/Package=1206, Construction=Rectangular, Contact Plating=Tin, Depth=1.6mm, Features="Automotive AEC-Q200", Height=0.028inch, Lead Free="Lead Free", Length=3.2mm, Military Standard=Not, Mount="Surface Mount", Number of Terminations=2, Packaging="Tape and Reel", Power Rating=250mW, Radiation Hardening=No, RoHS Compliant=Yes, Series=RMCF, Size Code=1206, Width=0.063inch
"R 1" "R 3": library part CMP-2000-06067-1, "CAT / CAY 16 Series - Chip Resistor Array, 10 KOhm, +/- 5%, 50 V, -55 to 125 degC, 8-Pin SMD, RoHS, Tape and Reel", Manufacturer=Bourns, Number of Resistors=4, Operating Temperature=-55°C~125°C, Package / Case=1206(3216Metric),Concave,LongSideTerminals, Package Description="8-Pin Surface Mount Device, Body 3.2 x 1.55 mm, Pitch 0.8 mm", Power Per Element=62.5mW, Resistance (Ohms)=10k, Standard Package=1, Supplier Device Package=1206, Temperature Coefficient=±200ppm/°C, Tolerance=±5%, Applications=-, Category=Resistors, Circuit Type=Isolated, Datasheet URL=http://www.mouser.com/ds/2/54/ATCAY-777361.pdf, Datasheet Version=09/2014, EDA / CAD Models=DownloadfromAcceleratedDesigns, Family=ResistorNetworks,Arrays, Height="0.024\"(0.60mm)", Manufacturer URL=http://www.bourns.com/, Mounting Technology=SurfaceMount, Mounting Type=SurfaceMount, Number of Pins=8, Online Catalog=CAT16Series, Other Names=CAT16-103J4LFDKR, Package Reference=CAT16-103J4LF, Packaging=Digi-Reel®, RoHS Information=CAT16MaterialDeclaration, Series=CAT16, Size / Dimension="0.126\"Lx0.061\"W(3.20mmx1.55mm)"
"R 2" "R 4": library part CMP-2003-03957-1, Manufacturer=Yageo, Part Number=RC1206JR-0720RL
SW1 SW2: library part CMP-2000-07501-1, "FSMSM Push Button Switch, 50 mA, -35 to 85 degC, 2-Pin SMD, RoHS, Tape and Reel", Case\/Package=SMD/SMT, Contact Current Rating=50mA, Contact Resistance=100mOhm, Manufacturer="TE Connectivity", Max Operating Temperature=85degC, Max Voltage Rating (DC)=12V, Min Operating Temperature=-35degC, Operating Force=180gf, Package Description="2-Pin Surface Mount Device, Body 6 x 3.5 mm, Pitch 9.19 mm", Package Quantity=1800, Voltage Rating (DC)=24V, Actuator Length=1.07mm, Actuator Material=Polyamide, Contact Material=Brass, Contact Plating=Silver, Current Rating=50mA, Datasheet URL=http://www.te.com/commerce/DocumentDelivery/DDEController?Action=showdoc&DocId=Customer+Drawing%7F1437566-3%7FC2%7Fpdf%7FEnglish%7FENG_CD_1437566-3_C2_1437566_3_1_c.dwg.pdf%7F1437566-4, Datasheet Version="Rev. C2, 08/2014", Electrical Life=20000Cycles, ELV=Compliant, Illumination Type=Illuminated, Lead Free=LeadFree, Manufacturer URL=http://www.te.com/, Mechanical Life=20000Cycles, Mount=SurfaceMount, Mounting Technology=SurfaceMount, Orientation=Straight, Package Reference=FSMSMTR, Packaging=TapeandReel, REACH SVHC=Unknown, RoHSCompliant=true, Switch Travel=0.25mm, Termination=GullWing, Throw Configuration=SPST
SW3: library part CMP-03408-000017-1, "SWITCH TOGGLE SPDT 0.4VA 20V", Actuator Color=Chrome, Contact Current Rating=400mA, Contact Resistance=10mR, Flammability Rating="UL94 V-1", Insulation Resistance=30MR, Max Operating Temperature=85°C, Max Voltage Rating (AC)=20V, Min Operating Temperature=-30°C, Package Quantity=100, Power Rating=400mW, Actuator Length=10.41mm, Actuator Material=Phenolic, Actuator Type="Standard Round", Contact Material=Copper, Contact Plating=Gold, Depth=6.86mm, Electrical Life=6000Cycles, ELV=Compliant, Illumination Type=Non-Illuminated, Lead Free="Lead Free", Max Voltage Rating (DC)=20V, Mount=Panel, Number of Poles=1, Number of Positions=2, Orientation=Straight, Packaging=Bulk, Radiation Hardening=No, REACH SVHC="No SVHC", RoHS Compliant=Yes, Series="Gemini A", Switch Function=On-On, Termination="PC Pins", Throw Configuration=SPDT, Voltage Rating (AC)=20V, Voltage Rating (DC)=20V
T1 T2: library part CMP-02550-000285-1, "MOSFET N/P-CH 20V SC89-6", Case/Package=SOT-563, Continuous Drain Current (ID)=370mA, Drain to Source Breakdown Voltage=20V, Drain to Source Resistance=800mR, Drain-source On Resistance-Max=700mR, Gate to Source Voltage (Vgs)=6V, Max Operating Temperature=150°C, Max Power Dissipation=250mW, Min Operating Temperature=-55°C, Package Quantity=3000, Drain to Source Voltage (Vdss)=20V, FET Type="N and P-Channel", Height=0.6mm, Lead Free="Lead Free", Length=1.7mm, Mount="Surface Mount", Number of Channels=2, Number of Elements=2, Number of Pins=6, On-State Resistance=700mR, Packaging="Tape and Reel", Polarity=N-CHANNEL, Power Dissipation=250mW, Radiation Hardening=No, Rds On Max=700mR, RoHS Compliant=Yes, Series=TrenchFET®, Weight=0.001129oz, Width=1.2mm
U1: library part CMP-04917-000136-1, "IC REG LIN POS ADJ 500MA TO252-3", Case/Package=TO-252-3, Dropout Voltage=2V, Max Input Voltage=40V, Max Operating Temperature=125°C, Max Output Current=500mA, Max Output Voltage=37V, Min Input Voltage=4.2V, Min Operating Temperature=-40°C, Min Output Voltage=1.25V, Package Quantity=2500, Power Supply Rejection Ratio (PSRR)=80dB, Quiescent Current=3.5mA, Reference Voltage=1.3V, Contact Plating=Tin, Height=2.39mm, Lead Free="Lead Free", Length=6.7mm, Min Current Limit=500mA, Mount="Surface Mount", Number of Outputs=1, Number of Pins=3, Number of Regulators=1, Output Current=500mA, Output Type=Adjustable, Output Voltage=37V, Packaging="Tape and Reel", Polarity=Positive, Radiation Hardening=No, REACH SVHC="No SVHC", RoHS Compliant=Yes, Weight=0.011598oz, Width=6.22mm
u_1: library part CMP-2000-06822-2, "IC BUF NON-INVERT 5.5V SC70-6", Case/Package=SC, High Level Output Current=32mA, Max Operating Temperature=85°C, Max Power Dissipation=180mW, Max Supply Current=24mA, Max Supply Voltage=5.5V, Min Operating Temperature=-40°C, Min Supply Voltage=1.65V, Package Quantity=1, Quiescent Current=1uA, Height=1mm, Lead Free="Lead Free", Length=2mm, Logic Function=Buffer, Low Level Output Current=32mA, Mount="Surface Mount", Number of Bits=2, Number of Bits per Element=1, Number of Channels=2, Number of Circuits=2, Number of Elements=2, Number of Input Lines=2, Number of Inputs=2, Number of Output Lines=2, Number of Outputs=2, Number of Pins=6, Packaging="Tape and Reel", Polarity=Non-Inverting, Propagation Delay=12.6ns, Radiation Hardening=No, REACH SVHC="No SVHC", Termination=SMD/SMT, Turn-On Delay Time=11.5ns, Weight=0.028g, Width=1.25mm
X1: library part CMP-003-00019-2, "Ceramic SMD Crystal, 24 MHz, +/- 20 ppm, 18 pF, -20 to 70 degC, 4-Pin SMD, RoHS, Tape and Reel", Case/Package=CSMD, Frequency=24MHz, Frequency Tolerance=20ppm, Load Capacitance=18pF, Manufacturer=Abracon, Max Operating Temperature=70°C, Min Operating Temperature=-20°C, Package Description="4-Pin Surface Mount Device, Body 5 x 3.2 mm", Package Quantity=1000, Package Reference=ABM3B, Resistance=50Ohm, Datasheet URL=http://www.abracon.com/Resonators/abm3b.pdf, Datasheet Version=Aug-15, ESR=50, Manufacturer URL=http://www.abracon.com/, Mounting Technology=SM, Packaging=TapeandReel, Pins=4, RoHS Compliant=True, Tolerance=20ppm
Y1: library part CMP-06057-000013-1, "CERAMIC RES 20.0000MHZ 15PF SMD", Capacitance=15pF, Case/Package=SMD/SMT, Frequency=20MHz, Frequency Stability=0.3%, Frequency Tolerance=0.5%, Max Operating Temperature=80°C, Min Operating Temperature=-20°C, Package Quantity=3000, Resistor Type=Ceramic, Contact Plating=Gold, Height=0.039inch, Impedance=40R, Lead Free="Lead Free", Length=0.126inch, Load Capacitance=15pF, Mount="Surface Mount", Number of Pins=3, Packaging="Tape and Reel", REACH SVHC="No SVHC", Self Resonant Frequency=20MHz, Termination=SMD/SMT, Tolerance=0.5%, Width=0.051inch

## Free pads (board coordinates)
  round 60 hole 30: 2(2915,2545) 3(2395,2545) 4(2670,2545) 5(2750,2545) 6(2835,2545) 7(4330,2565) 8(4525,2825) 9(4495,2565) 10(4525,2660) 11(4525,2745) 12(4410,2565) 13(4501.5,3450) 14(4321.5,3395) 15(4501.5,3525) 16(4011.5,3750) 17(3931.5,3750) 18(4196.5,3825) 19(4346.5,3785) 20(3195,3760) 21(3600,3370) 22(3195,3465) 23(3690,3725) 24(3695,3585) 25(3505,3845) 26(3695,3495) 27(3195,3605) 28(3350,3345) 29(3270,2010) 30(3404.84,2010.16) 31(3585,2010) 32(3456.3,1580) 33(3371.3,1580) 34(3286.3,1580) 35(3400,2655) 36(3480,2655) 37(3560,2655) 38(3630,2755) 39(3630,2830) 40(3625,2905) 41(3604.63,2979.63) 43(3300,3005) 44(3640,2660) 45(4455,1945) 46(4455,1870) 47(4455,2095) 48(4455,2170) 49(3850,2040) 50(3850,1885) 51(3850,1805) 52(3850,1965) 53(3850,2115) 54(3845,2200) 57(5105,670) 58(5090,1265) 59(4626.5,3535) 60(4276.5,3315) 61(3195,2015)

## Via types
v1: diameter 50, hole 28, Top Layer to Bottom Layer, 13 vias

## Nets (pads, with @x,y where several pads share a name; then routed paths per layer and width w, separated by ;. In a path a pad name is that pad's centre, name@x,y a point inside that pad or via, vN(x,y) a via of type N, cw(c..) or ccw(c..) an arc to the next point about the centre after c; other vN are vias at no path point)
1.25V: pad.43 q.1 | length 518.5
  Top Layer w10: pad.43 3415.71,3004.63 q.1 3417.67,2998.75 3393.75,2998.75 3354.63,2959.63 3284.63,2959.63 3264.63,2939.63 3264.63,2865.34 3282.03,2847.93 3341.71,2847.93 3355.96,2862.19 3389.39,2862.19 ; 3447.43,3038.1 3447.86,3038.69 3450.72,3041.55
3.3V: *1.F5 pad.44 | length 189.1
  Top Layer w10: *1.F5 3504.31,2747.26 3504.31,2729.06 3518.74,2714.63 3578.27,2714.63 3581.45,2711.45 3588.55,2711.45 pad.44
+1.25: *1.A5 *1.B1 *1.B6 *1.C6 *1.F2 *1.F3 | length 775.1
  Top Layer w5: *1.A5 *1.B6
  Top Layer w10: 3269.63,3005 3215,3005 3175,2965 3175,2695 3205,2665 3344.54,2665 3418.04,2738.51 3418.04,2750.85 *1.F2 *1.F3 ; *1.C6 *1.B6
+5: "C 1.1" "C 3.1" "R 1.5" "R 1.6" "R 1.7" "R 1.8" "R 2.2" "R 3.5" "R 3.6" "R 3.7" "R 3.8" "R 4.2" B1.9 B1.13 B2.9 B2.13 pad.2 | length 2927.5
  Top Layer w10: 2492.76,2518.5 2524.25,2518.5 2555.75,2518.5 2587.24,2518.5 ; 2564.49,3090 2532.99,3090 2501.5,3090 2470,3090 ; B1.9 2705,2895 ; 2911.1,3690 2911.1,3631.1 2890,3610 2800,3610 B2.9 ; pad.2 3000,2630 3000,2843.9 2945,2898.9 2930,2883.9 ; 2930,2746.57 2930,2883.9 ; 2940,3471.57 2903.12,3471.57 2871.55,3440 2790,3440 B2.9 ; 2470,3090 2470,3099.84 2467.13,3102.72 2457.28,3102.72 2441,3119 2435.86,3119 2430,3124.86 2430,3410 2455,3435 2455,3465 B2.13 2510,3460 2530,3440 2690,3440 2710,3460 B2.9 ; 2470,3090 2470,2990 B1.13 2505,2890 2520,2875 2695,2875 2705,2885 2705,2895 ; 2705,2895 2760,2840 2886.1,2840 2930,2883.9
antenna: 5.1 *.13 B4.11 B5.11 L1.2 pad.24 pad.46 pad.57 | length 484.1
  Top Layer w10: *.13 3629.25,3600 pad.24 ; B4.11 4351.54,1880.55 4387.44,1880.55 4397.99,1870 pad.46 ; B5.11 5070.08,719.92 5105,685 pad.57 ; v1(5099.18,565.16) 5145.63,575.16 L1.2
  Bottom Layer w10: v1(5099.18,565.16) 5100,565.99 5100,665 pad.57
"AVDD 1.8V": "C 6.2" B3.8 pad.15 | length 210.5
  Top Layer w10: B3.8@4351.97,3614.33 4453.05,3614.33 4453.05,3573.45 pad.15
GND: 2.2 3.2 4.1 "C 1.2" "C 3.2" "C 5.1" "C 6.1" "C 7.1" *1.A1 *1.A2 *1.A4 *1.B4 *1.B5 *1.D6 *1.E1 *1.E4 *1.F4 *.6 *.12 *.14 *.26 *.30 B1.5 B1.6 B2.6 B3.1 B3.6 B3.7 B4.1 B4.10 B4.12 B4.15 B5.1 B5.10 B5.12 B6.3 B6.8 B6.9 C1.1 C2.2 D1.1 D2.1 DS1.2 pad.6 pad.8 pad.13 pad.28 pad.29 pad.33 pad.41 pad.45 R4.1 T2.6 Y1.2 Y1.3 | length 10643.2
  Top Layer w5: *1.E4@3472.07,2784.3 3482.4,2794.63 3517.19,2794.63 *1.D6@3528.41,2805.85 ; *1.B5 3499.63,2834.63 *1.D6
  Top Layer w10: v1(2320,3685) 3.2 3.2@2405,3687.99 ; B1.5 B1.6 ; v1(2710,2810) 2705,2805 B1.6 ; v1@2710,3370 B2.6 2777.99,3211.85 2.2 ; v1(2710,3375) 2743.43,3408.43 2940,3408.43 ; 2930,2683.43 2930,2640 pad.6 2705,2675 B1.6 ; 3217.38,2740.89 3267.82,2690.45 3341.71,2690.45 3350.49,2699.24 3350.49,2770.49 3359.51,2779.51 *1.E1 ; DS1.2 3260,2020 pad.29 ; *.30 3256.93,3539.25 3197.11,3539.25 3150,3586.36 3150,3640 v1(3195,3685) 3196.14,3686.14 *.26 ; 3311.87,2898.37 3320.49,2889.74 *1.A1 *1.A2 3416.95,2884.95 3439.72,2862.19 *1.B4 ; pad.28 3410,3345 D1.1 ; Y1.3 Y1.2 3331.3,1725 3301.77,1695.47 R4.1 3301.77,1649.53 pad.33 ; D2.1 3440,3400 3464.37,3424.37 *.6 ; *1.E4@3472.07,2784.3 *1.E4 *1.F4 *1.F4@3476.75,2756.63 ; *1.B5 *1.B4 ; *1.D6 3528.41,2805.85 *1.D6@3529.63,2804.63 ; pad.41 3539.63,2914.63 3489.63,2914.63 3472.07,2897.07 *1.A4 *1.B4 ; *.12 3590.07,3568.03 3584.21,3573.89 3584.21,3635.06 3590.07,3640.92 3616,3640.92 *.14 3630.08,3655 v1(3690,3655) ; B4.1 4178,2198.23 4295.36,2080.87 4324.45,2080.87 B4.15 4333.7,2065 4295,2065 4295,2063.81 4286.57,2055.39 4286.57,1959.73 4295.36,1950.94 4324.45,1950.94 B4.12 ; B3.6 B3.7 ; B4.10 4337.01,1864.33 4295.36,1864.33 4286.57,1873.12 4286.57,1925.83 4337.01,1925.83 B4.12 ; B6.3 4360.91,2685.91 4360.91,2678.21 4360,2677.31 4360,2669.02 4334.79,2643.81 4091.19,2643.81 4058.81,2676.19 4058.81,2744.49 4124.33,2810 4215,2810 4285,2880 4375,2880 4395.86,2859.14 4395.86,2850.86 4391.3,2846.3 ; B6.9 B6.8 4474.8,2825 ; 4391.22,2840 4391.3,2839.92 4397.28,2833.94 4406.22,2825 4474.8,2825 ; 4.1 4406.5,3493.28 C1.1 4473.22,3450 pad.13 4516.5,3465 4516.5,3480 4520.14,3480 4546.5,3506.36 4546.5,3543.64 4516.5,3573.64 4516.5,3615 4516.5,3694.53 4506.02,3705 ; pad.45 4343.62,1945 B4.12 ; pad.8 4474.8,2825 ; v1@5025,660 v1@5025,670 ; B5.12@5111.77,765 5111.77,813.23 5105,820 5030,820 5025,815 5025.16,814.84 5025.16,765 5025,764.84 v1@5025,670 ; C2.2 5080,520 5000,600 4990,600 4940,650 4940,828.28 5200.3,1088.58 5350.27,1088.58 5353.3,1091.61 5371.61,1091.61 B5.1@5371.61,1139.02 ; 5151.6,635 5243.29,635 5264.29,656 5345.71,656 5354.5,647.21 5354.5,640.5 5395,600 T2.6 ; 5153.28,634.67 5114.81,626.08 cw(c5105,670) 5084.38,630 5065,630 5062.07,632.93 v1@5025,670 ; v1(5370,1265) 5370,1150.24 B5.1
  Bottom Layer w10: v1(2320,3685) 2385,3620 2465,3620 v1(2710,3375) v1(2710,2810) ; v1(3195,3685) 3350,3530 pad.28 3660,3655 v1(3690,3655) ; v1@5025,670 5070,715 5123.64,715 5133.64,705 5425,705 5425,1210 v1(5370,1265)
  other v1: 5025,665
Net1_1: 1.1 DS1.1 | length 60
  Top Layer w10: DS1.1 1.1
Net1_2: 1.2 U1.4 | length 648.3
  Top Layer w10: 3195,2060 3195,2395 3199.06,2399.06 1.2 3466.89,2399.06 U1.4
Net2_1: 2.1 B1.12 | length 200.2
  Top Layer w10: B1.12 2555,3017.99 2.1
Net3_1: 3.1 B2.12 | length 178.3
  Top Layer w10: 3.1 2527.99,3632.01 2560,3600 B2.12
Net5_2: 5.2 *1.A3 q.2 | length 137.7
  Top Layer w10: q.2 3444.51,2923.66 ; *1.A3 3444.51,2921.58 3470,2947.07 5.2
Net*1_C1: *1.C1 X1.1 | length 222.4
  Top Layer w10: X1.1 3230.46,2885.29 3230.46,2853.79 3256.32,2827.93 3349.99,2827.93 3356.68,2834.63 *1.C1
Net*1_C3: "R 1.4" "R 3.4" *1.C3 *.35 B1.2 B2.2 B3.14 B4.16 B6.4 pad.3 pad.12 pad.18 pad.23 pad.47 R1.1 | length 2225.2
  Top Layer w10: pad.3 2430,2580 2470,2580 2471.5,2581.5 2492.76,2581.5 2492.76,2702.6 B1.2 ; 2470,3152.99 2470,3190 2510,3230 B2.2 2510,3330 2490,3350 2490,3370 v1(2480,3380) ; *.35 3356.14,3676.14 3405,3725 pad.23 ; pad.18 4196.5,3785 4221.18,3760.32 R1.1 4266.5,3700 B3.14 ; B4.16 4349.57,2099.06 4455,2099.06 pad.47 ; B6.4 4380.91,2682.28 4380.91,2669.93 4380,2669.02 4380,2615 4410,2585 pad.12
  Bottom Layer w10: pad.3 2480,2630 v1(2480,3380)
Net*1_C4: *1.C4 *1.D3
Net*1_D1: *1.D1 X1.3 | length 130.6
  Top Layer w10: X1.3 3311.87,2784.63 3334.31,2807.07 *1.D1
Net*1_D2: *1.D2 *.31 pad.22 | length 149.9
  Top Layer w10: pad.22 3224.94,3494.94 *.31
Net*1_D4: *1.D4 pad.38 | length 156.8
  Bottom Layer w10: *1.D4@3477.17,2807.34 pad.38@3625.32,2755.91
Net*1_E2: *1.E2
Net*_1: *.1 DS3.2 | length 100.5
  Top Layer w10: DS3.2 3230,3407.48 *.1
Net*_7: *.7 D1.2 | length 82.4
  Top Layer w10: D1.2 3490,3374.06 3490,3410 3503.74,3423.74 *.7
Net*_8: *.8 D2.2 | length 168.2
  Top Layer w10: D2.2 3499.06,3322.29 3540,3363.24 3540,3441.89 *.8
Net*_16: *.16
Net*_17: *.17
Net*_19: *.19 pad.25 | length 75.7
  Top Layer w10: *.19 3503.74,3843.74 pad.25
Net*_20: *.20
Net*_21: *.21
Net*_22: *.22
Net*_23: *.23
Net*_27: *.27 pad.27 | length 88.9
  Top Layer w10: pad.27 3240.17,3646.77 *.27
Net*_32: *.32 pad.26 | length 361.2
  Top Layer w10: *.32 3364.76,3540.24 3410,3495 pad.26@3675,3495
Net*_36: *.36 B6.5 pad.9 pad.20 | length 309
  Top Layer w10: pad.20 3233.68,3724.11 3236.44,3721.44 *.36 ; B6.5 4407.24,2652.76 pad.9
NetB1_3: "R 1.3" "R 3.3" "R 5.1" B1.3 B2.3 B3.13 B4.17 B6.2 pad.4 pad.19 pad.48 | length 1606.5
  Top Layer w10: 2501.5,3152.99 2501.5,3181.5 2525,3205 2540,3205 2555,3220 2555,3274.84 B2.3 2560,3370 v1(2550,3380) ; 2524.25,2581.5 2525,2582.24 2525,2625 2555,2655 B1.3 ; B3.13 4306.5,3680.32 4306.5,3720 4346.5,3760 pad.19 4411.81,3785 ; B4.17 4351.54,2169.45 4455,2169.45 pad.48
  Bottom Layer w10: v1(2550,3380) 2550,2665 pad.4
NetB1_4: "R 1.2" "R 3.2" B1.4 B2.4 B4.2 pad.5 pad.54 | length 1458
  Top Layer w10: 2532.99,3152.99 2541.61,3161.61 2541.61,3178.33 2573.28,3210 2600,3210 2600,3269.84 B2.4 2610,3350 2620,3360 v1(2620,3380) ; 2555.75,2581.5 2555.75,2605.75 2605,2655 B1.4 ; pad.54 3890.08,2154.92 B4.2
  Bottom Layer w10: v1(2620,3380) 2620,2675 pad.5
NetB1_10: "C 2.1" B1.10 | length 361.2
  Top Layer w10: B1.10 2655,3030 2675,3050 2860,3050 2879.13,3069.13 2879.13,3115
NetB2_5: "R 3.1" B2.5 | length 183.1
  Top Layer w10: 2564.49,3152.99 2601.5,3190 2630,3190 2660,3220 B2.5
NetB2_10: "C 4.1" B2.10 | length 180.5
  Top Layer w10: 2634.57,3690 2634.57,3630.43 2660,3605 B2.10
NetB3_2: B3.2 pad.17 SW1.2 | length 575.5
  Top Layer w10: SW1.2@3966.5,3670 SW1.2 3931.5,3690.91 pad.17 3976.5,3795 4030.14,3795 4050.14,3775 4176.5,3775 4176.5,3695 4216.5,3655 4259.33,3655 B3.2
NetB3_3: B3.3 pad.16 SW2.2 | length 296.8
  Top Layer w10: pad.16 4082.4,3750 SW2.2 4198.15,3634.25 B3.3
NetB3_4: B3.4
NetB3_9: "C 5.2" B3.9 | length 124.3
  Top Layer w10: B3.9 4376.22,3634.25 4446.97,3705
NetB3_17: B3.17
NetB4_3: B4.3 B4.5 pad.49 pad.53 | length 235
  Top Layer w10: pad.49 3850,2037.56 3950.43,2037.56 B4.5 ; pad.53 3959.61,2115 B4.3
NetB4_9: B4.9 pad.51 | length 132.4
  Top Layer w10: pad.51 3896.77,1851.77 B4.9
NetB5_2: B5.2 B5.3 B5.9
NetB5_5: B5.5 u_1.3
NetB5_13: B5.13 T2.2 | length 479.8
  Top Layer w10: B5.13@5155.08,765 5167.44,742.56 5169.14,685.86 5175,680 5179.14,680 5490,680 5490,630 5480,620 5470,620
NetB5_14: B5.14 R6.1 T1.6 | length 1013.2
  Top Layer w10: 5088.69,606.01 5088.4,605.72 5061,605.72 5045.25,621.46 5007.68,621.46 4997.07,622.93 4960,660 4960,820 4980,840 5175,840 5200,815 B5.14@5200,766.61 ; 5089.06,606.38 5097.77,605.4 ccw(c5105,670) 5104.89,605 5120,604.97 ; 5120,606.08 5213.92,606.08 v1(5225,595) 5226,594 T1.6@5280,594 ; v1(5320,500) R6.1
  Bottom Layer w10: v1(5225,595) v1(5320,500)
NetB6_6: B6.6 pad.10 | length 125.6
  Top Layer w10: B6.6 4460,2669.25 4465.75,2669.25 4470,2665 4520,2665 pad.10
NetB6_7: B6.7 pad.11 | length 110.1
  Top Layer w10: B6.7 4513.03,2733.03 pad.11
NetB6_10: "C 7.2" B6.10 SW3.2 | length 334.8
  Top Layer w10: SW3.2 4172.44,2757.44 B6.10 4360,2828.7 4371.3,2840
NetC2_1: C2.1 L1.1 R5.2 | length 48
  Top Layer w10: C2.1 R5.2
NetC3_2: C3.2 SW3.1 | length 275
  Top Layer w10: C3.2 4059.92,2900 SW3.1
"NetC 2_2": "C 2.2" "R 2.1" | length 106
  Top Layer w10: 2945,3011.1 2950,3016.1 2950,3115
"NetC 4_2": "C 4.2" "R 4.1" | length 93.5
  Top Layer w10: 2705.43,3690 2798.9,3690
NetDS2_1: DS2.1 DS2.4
NetDS2_2: DS2.2
NetDS2_3: DS2.3 pad.32 R4.2 | length 314.8
  Top Layer w10: R4.2 R4.2@3366.3,1670 ; 3441.3,1745 3405.87,1709.57 ; DS2.3 3405.87,1709.57 ; pad.32 3456.3,1625.67 3441.3,1640.67 3411.97,1670 R4.2@3366.3,1670 ; R4.2@3366.3,1670 3405.87,1709.57
NetQ1_1: 
NetQ1_3: 
NetR2_1: R2.1 SW1.1 | length 415.3
  Top Layer w10: SW1.1 3997.4,3294.09 4021.5,3270 4156.5,3270 4236.5,3350 4236.5,3444.68 R2.1
NetR3_1: R3.1 SW2.1 | length 221.8
  Top Layer w10: SW2.1 4211.5,3439.09 4211.5,3495 4231.5,3515 R3.1
NetR5_1: R5.1 T1.1 u_1.4 | length 375.1
  Top Layer w10: u_1.4 5010.71,488.11 5093.61,488.11 5097.75,488.11 5229.75,488.11 5238.54,496.89 5238.54,502.51 5255,518.97 R5.1 5329,594 T1.1@5330,594
NetR6_2: R6.2 T1.2 T2.1 | length 315.2
  Top Layer w10: T1.2 5350,615 5360,605 5360,560.86 5365.86,555 5410,555 5452.6,512.4 R6.2@5473.05,512.4 ; T2.1@5455,600 5455,530.44 R6.2@5473.05,512.4 ; R6.2@5479.24,506.2 R6.2@5473.05,512.4
"NetTeensy 1_16": 
"NetTeensy 1_17": 
"NetTeensy 1_20": pad.34 Y1.1 | length 199.7
  Top Layer w10: pad.34 3286.3,1620 3266.3,1640 3266.3,1732.4 Y1.1
"NetTeensy 1_D+": 
"NetTeensy 1_D-": 
"NetTeensy 1_VUSB": 
NetU1_3: pad.31 U1.3 | length 97.2
  Top Layer w10: pad.31 3585,2107.01 U1.3
VCC: *.9 *.10 B4.6 B5.6 pad.21 pad.52 | length 241.5
  Top Layer w10: *.9 *.10@3617.52,3445 ; pad.21 3600,3427.48 *.10@3617.52,3445 ; *.10 *.10@3617.52,3445 ; pad.52 3866.69,1981.69 B4.6
"VCC 3.3V": B4.7 B4.8 B5.7 B5.8 B5.15 pad.50 pad.58 | length 903.2
  Top Layer w10: pad.50 3952.91,1885 B4.8 B4.7 B4.7@3962.99,1950.94 ; B5.8 B5.7 5113.39,1241.61 pad.58
  Bottom Layer w10: pad.58 5090,925 5245,770
VDD: C3.1 pad.7 SW3.3 | length 497.8
  Top Layer w10: C3.1 4079.92,2530 SW3.3 4165,2565 pad.7
"VDDIO 1.8V": 4.2 "R 5.2" B3.5 B3.12 C1.2 pad.14 R1.2 R2.2 R3.2 | length 789.5
  Top Layer w10: R1.2 4266.5,3805 4291.5,3830 4409.68,3830 4451.18,3788.5 4451.18,3785 4451.18,3781.5 4409.68,3740 4371.5,3740 4351.5,3720 4346.5,3720 4326.5,3700 4326.5,3680.63 B3.12 ; B3.5@4286.26,3608.15 4284.74,3606.63 4284.74,3518.56 R3.2 R2.2 4281.18,3435.32 pad.14 4351.5,3425 4.2 4375,3484.77 C1.2
pads on no net: "R 1.1" *1.A6 *1.C5 *1.D5 *1.E3 *1.E5 *1.E6 *1.F1 *1.F6 *. *.2 *.3 *.4 *.5 *.11 *.15 *.18 *.24 *.25 *.28 *.29 *.33 *.34 B1.1 B1.7 B1.8 B1.11 B1.14 B2.1 B2.7 B2.8 B2.11 B2.14 B3.10 B3.11 B3.15 B3.16 B3.18 B3.19 B3.20 B4.4 B4.13 B4.14 B4.18 B5.4 B5.16 B5.17 B5.18 B6.1 DS3.1 T1.3 T1.4 T1.5 T2.3 T2.4 T2.5 U1.1 u_1.1 u_1.2 u_1.5 u_1.6 X1.2 X1.4
copper on no net: | length 1602.4
  Top Layer w10: 2370,2850 2375,2855 ; 3404.84,2010.16 3404.84,2107.17